# Altium PCB Industrıal Com Board wıth GSM and GPS modules.PcbDoc (part 1 of 2)
Units mm, origin at the board's own origin, x right, y up, seen from the top; angles counter-clockwise.
Board outline 162.76 x 100.02 mm, 2 copper layers (Top Layer, Bottom Layer), stack 0.325 mm thick; 201 components, 89 nets, 674 pads, 144 vias.
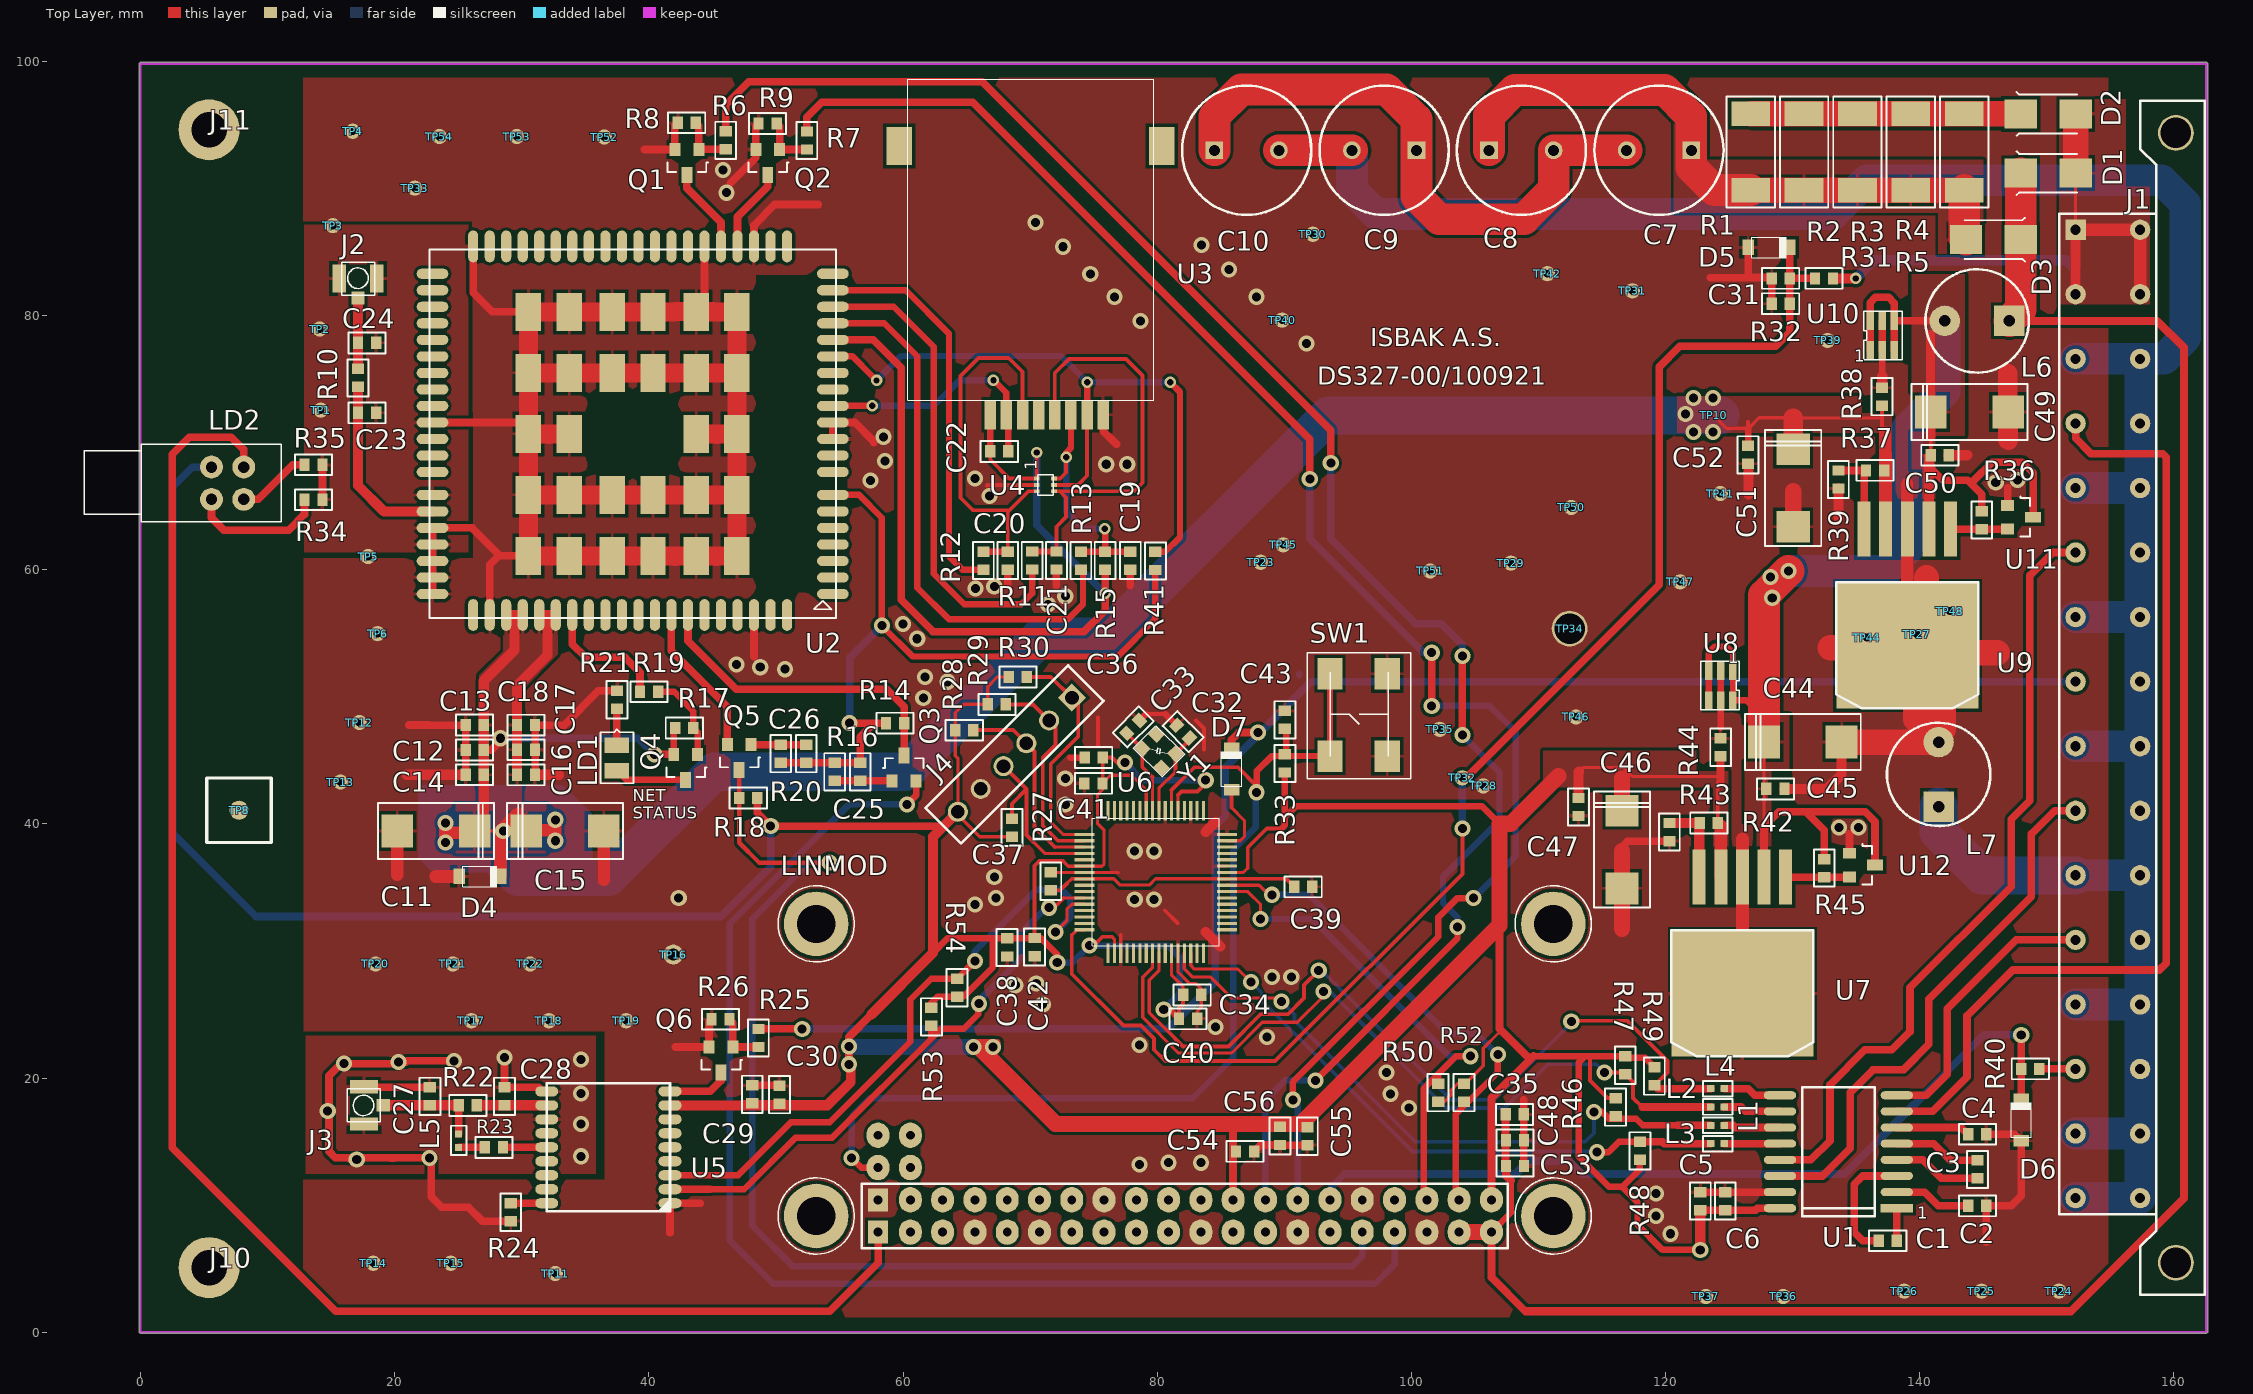
[diagram p0: Top Layer view]
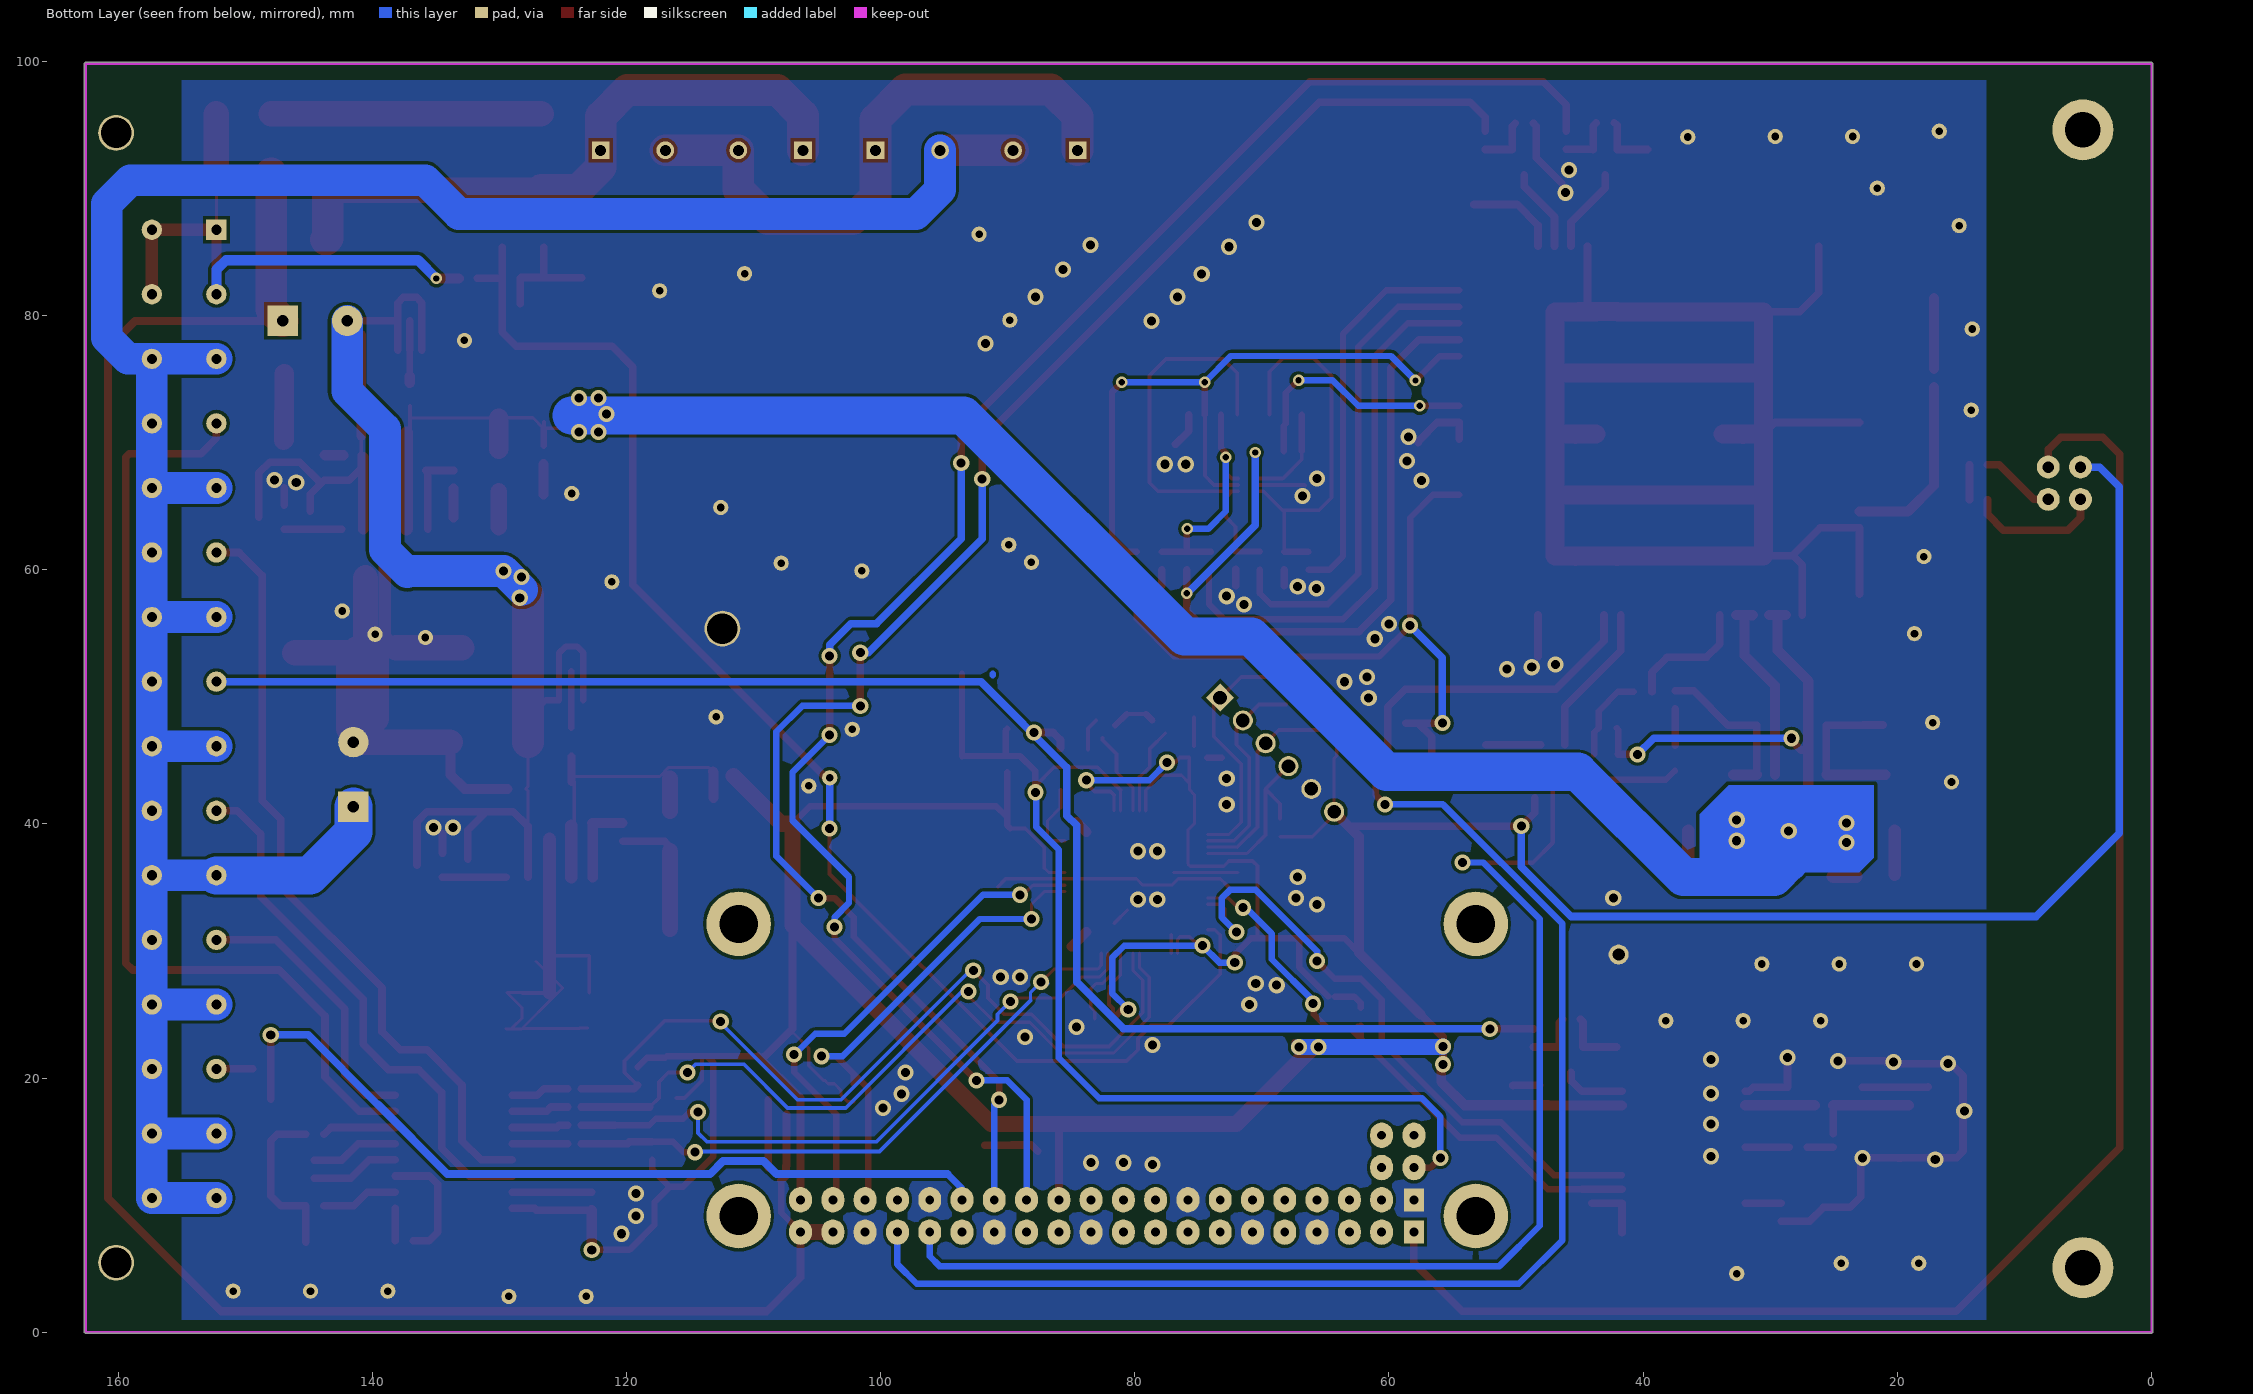
[diagram p1: Bottom Layer view, seen from below]

## Layer stack, top to bottom
Top Solder: solder mask 0.0102, Solder Resist, Dk 3.5
Top Layer: signal copper 0.0356
Dielectric 1: core 0.254, FR-4, Dk 4.2
Bottom Layer: signal copper 0.0356
Bottom Solder: solder mask 0.0102, Solder Resist, Dk 3.5

## Board outline
-0.1,0 0,-0.1 162.56,-0.1 162.66,0 162.66,99.822 162.56,99.922 0,99.922 -0.1,99.822

## Design rules (kind name [scope] priority, off if disabled: settings)
Clearance Clearance_4 [OnLayer('Mid-Layer 2') And (IsThruPin Or IsSMTPin Or IsWire) vs OnLayer('Mid-Layer 2') And (IsThruPin Or IsSMTPin Or IsWire Or IsVia)] p1: gap=0.2 ignorepadtopadclearanceinfootprint=FALSE
Clearance Clearance_3 [OnLayer('Mid-Layer 1') And (IsThruPin Or IsSMTPin Or IsWire) vs OnLayer('Mid-Layer 1') And (IsThruPin Or IsSMTPin Or IsWire Or IsVia)] p2: gap=0.2 ignorepadtopadclearanceinfootprint=FALSE
Clearance Clearance_2 [OnLayer('Bottom Layer') And (IsThruPin Or IsSMTPin Or IsWire) vs OnLayer('Bottom Layer') And (IsThruPin Or IsSMTPin Or IsWire Or IsVia)] p3: gap=0.2 ignorepadtopadclearanceinfootprint=FALSE
Clearance Clearance_1 [OnLayer('Top Layer') And (IsThruPin Or IsSMTPin Or IsWire Or IsVia) vs OnLayer('Top Layer') And (IsThruPin Or IsSMTPin Or IsWire Or IsVia)] p4: gap=0.127 ignorepadtopadclearanceinfootprint=FALSE
Clearance [All] p5: gap=0.203 ignorepadtopadclearanceinfootprint=FALSE except(0.254: Track-Poly SMDPad-Poly THPad-Poly Via-Poly Poly-Poly; 0.305: Track-Region SMDPad-Region THPad-Region Via-Region Poly-Region)
ComponentClearance [All] p1: gap=0 collisioncheckmode=3 verticalgap=0 showdistances=FALSE
PlaneConnect [All] p1: planeconnectstyle=Relief reliefexpansion=0.635 reliefentries=4 reliefconductorwidth=3 reliefairgap=4
PolygonConnect [All] p1: thpad.connectstyle=Direct thpad.reliefconductorwidth=0.254 thpad.reliefentries=4 thpad.polygonreliefangle="90 Angle" thpad.airgapwidth=0.254 smdpad.connectstyle=Relief smdpad.reliefconductorwidth=0.254 smdpad.reliefentries=4 smdpad.polygonreliefangle="90 Angle" smdpad.airgapwidth=0.254 via.connectstyle=Direct via.reliefconductorwidth=0.254 via.reliefentries=4 via.polygonreliefangle="90 Angle" via.airgapwidth=0.254
RoutingVias [All] p1: holewidth=0.711 width=1.27 viastyle="Through Hole" minholewidth=0.711 minwidth=1.27 maxholewidth=0.711 maxwidth=1.27
SolderMaskExpansion [All] p1: expansion=0
Width Net_Width_8 [InNet('V_INPUT')] p1: maxlimit=3 minlimit=0.2 preferedwidth=0.2
Width Net_Width_7 [InNet('UART3_RX') Or InNet('UART3_TX') Or InNet('USIM_CLK') Or InNet('USIM_DATA') Or InNet('USIM_GND') Or InNet('USIM_PRESENCE') Or InNet('USIM_RST') Or InNet('USIM_VDD') Or InNet('VCC_RESET') Or InNet('VCC_RESET2') Or InNet('VDDC') Or InNet('VDD_EXT')] p2: maxlimit=5 minlimit=0.2 preferedwidth=0.2
Width Net_Width_6 [InNet('N167764731') Or InNet('N1676049714') Or InNet('N1676049715') Or InNet('OSC1') Or InNet('OSC2') Or InNet('RST') Or InNet('STATUS') Or InNet('TCK') Or InNet('TDI') Or InNet('TDO') Or InNet('TMS') Or InNet('UART1_RXD') Or InNet('UART1_TXD')] p3: maxlimit=5 minlimit=0.2 preferedwidth=0.2
Width Net_Width_5 [InNet('N16976209') Or InNet('N16988393') Or InNet('N17001399') Or InNet('N17001733') Or InNet('N17012943') Or InNet('N17059960') Or InNet('N17103685') Or InNet('N17104446') Or InNet('N17118642') Or InNet('N17156443') Or InNet('N167764730')] p4: maxlimit=5 minlimit=0.2 preferedwidth=0.2
Width Net_Width_4 [InNet('N16792798') Or InNet('N16796289') Or InNet('N16825415') Or InNet('N16836609') Or InNet('N16842170') Or InNet('N16844098') Or InNet('N16844265') Or InNet('N16846634') Or InNet('N16893081') Or InNet('N16923026') Or InNet('N16926936')] p5: maxlimit=5 minlimit=0.2 preferedwidth=0.2
Width Net_Width_3 [InNet('N16761441') Or InNet('N16761497') Or InNet('N16761509') Or InNet('N16761521') Or InNet('N16761653') Or InNet('N16761697') Or InNet('N16769502') Or InNet('N16769674') Or InNet('N17181676') Or InNet('N16774897') Or InNet('N16791227')] p6: maxlimit=5 minlimit=0.2 preferedwidth=0.2
Width Net_Width_2 [InNet('LTE_ON/OFF_MC') Or InNet('LTE_RST') Or InNet('LTE_RST_MC') Or InNet('LTE_RX') Or InNet('LTE_RX_16760497') Or InNet('LTE_RX_MC') Or InNet('LTE_TX') Or InNet('LTE_TX_16760497') Or InNet('LTE_TX_MC') Or InNet('N16760577') Or InNet('N16760589')] p7: maxlimit=5 minlimit=0.2 preferedwidth=0.2
Width Net_Width_1 [InNet('+3V3') Or InNet('+3V8') Or InNet('+5V') Or InNet('+5VF') Or InNet('AN0') Or InNet('GND') Or InNet('GND_SIGNAL') Or InNet('GPS-RST') Or InNet('GPS_RST_CPU') Or InNet('GPS_RX') Or InNet('GPS_TX') Or InNet('LTE_ON/OFF') Or InNet('LTE_ON/OFF_CPU')] p8: maxlimit=5 minlimit=0.2 preferedwidth=0.2
Width [All] p9: maxlimit=5 minlimit=0.203 preferedwidth=0.203
28 further rules are at their usual default settings.

## Classes and differential pairs
component class Power: C44 C45 C46 C47 C49 C50 C51 C52 J10 J11 L6 L7 LD2 R34 R35 R36 R37 R38 R39 R42 R43 R44 R45 U7 U8 U9 U10 U11 U12
component class Microcontroller: C31 C32 C33 C34 C35 C36 C37 C38 C39 C40 C41 C42 C43 D5 D6 J4 R28 R29 R30 R31 R32 R33 R40 R50 R52 R53 R54 SW1 Y1
component class GPS: C27 C28 C29 C30 J3 L5 Q6 R22 R23 R24 R25 R26 TP38 TP43 TP49 U5
component class GPRS-LTE: C11 C12 C13 C14 C15 C16 C17 C18 C19 C20 C21 C22 C23 C24 C25 C26 D4 J2 LD1 Q1 Q2 Q3 Q4 Q5 R6 R7 R8 R9 R10 R11 R12 R13 R14 R15 R16 R17 R18 R19 R20 R21 R41 U2 U3 U4
component class Connector-PowerCUT: C1 C2 C3 C4 C5 C6 C7 C8 C9 C10 D1 D2 D3 J1 L1 L2 L3 L4 R1 R2 R3 R4 R5 R46 R47 R48 R49 U1

## Components (designator, comment, footprint, x,y, rotation, side; value= is the part's Value field where it differs from the comment)
C1 "100nF" SM/C_0603 138.196,7.193 r180 top
C2 "100nF" SM/C_0603 143.825,9.947 r0 top
C3 "100nF" SM/C_0603 144.546,12.101 r90 top
C4 "100nF" SM/C_0603 143.825,15.585 r0 top
C5 "100nF" SM/C_0603 122.733,9.601 r90 top
C6 "10UF" SM/C_0603 124.694,9.601 r90 top
C7 "10F-2V7" CPCYL1/D.400/LS.200/.034 122.025,93 r180 top
C8 "10F-2V7" CPCYL1/D.400/LS.200/.034 106.117,93 r0 top
C9 "10F-2V7" CPCYL1/D.400/LS.200/.034 100.4,93 r180 top
C10 "10F-2V7" CPCYL1/D.400/LS.200/.034 84.5,93 r0 top
C11 "100uF" SM/C_2917 25.166,39.431 r180 top
C12 "100nF" SM/C_0603 27.005,45.812 r180 top
C13 "33pF" SM/C_0603 27.005,47.773 r180 top
C14 "10pF" SM/C_0603 27.005,43.861 r180 top
C15 "100uF" SM/C_2917 31.496,39.431 r0 top
C16 "100nF" SM/C_0603 29.626,43.861 r0 top
C17 "33pF" SM/C_0603 29.626,45.832 r0 top
C18 "10pF" SM/C_0603 29.626,47.773 r0 top
C19 "33pF" SM/C_0603 77.881,60 r90 top
C20 "33pF" SM/C_0603 68.24,60 r90 top
C21 "33pF" SM/C_0603 72.07,60.01 r90 top
C22 "100nF" SM/C_0603 66.863,69.312 r0 top
C23 "C" SM/C_0603 17.12,72.349 r0 top
C24 "C" SM/C_0603 17.12,77.845 r0 top
C25 "1nF" SM/C_0603 56.642,44.806 r270 top
C26 "1nF" SM/C_0603 50.378,44.811 r90 top
C27 "C" SM/C_0603 22.769,17.851 r90 top
C28 "C" SM/C_0603 28.641,17.851 r90 top
C29 "10uF" SM/C_0603 48.133,18.009 r90 top
C30 "100nF" SM/C_0603 50.277,17.978 r90 top
C31 "100nF" SM/C_0603 129.774,82.916 r180 top
C32 "12pF" SM/C_0603 82.54,46.746 r135 top
C33 "12pF" SM/C_0603 77.607,47.127 r45 top
C34 "100nF" SM/C_0603 82.042,26.543 r0 top
C35 "100nF" SM/C_0603 107.417,17.145 r0 top
C36 "100nF" SM/C_0603 75.717,45.212 r180 top
C37 "100nF" SM/C_0603 71.628,34.773 r90 top
C38 "100nF" SM/C_0603 68.199,30.988 r270 top
C39 "1uF" SM/C_0603 90.78,35.052 r0 top
C40 "100nF" SM/C_0603 81.723,24.663 r0 top
C41 "10nF" SM/C_0603 75.692,43.18 r180 top
C42 "2.2uF" SM/C_0603 70.358,31.013 r270 top
C43 "0.1uF" SM/C_0603 90.043,47.473 r90 top
C44 "470uF" SM/C_2917 128.9,46.431 r0 top
C45 "100nF" SM/C_0603 127.935,42.753 r0 top
C46 "470uF" SM/C_2917 116.586,39.878 r270 top
C47 "100nF" SM/C_0603 113.157,42.037 r270 top
C48 "100nF" SM/C_0603 108.864,15.113 r180 top (schematic designator C35)
C49 "470uF" SM/C_2917 142.016,72.41 r0 top
C50 "100nF" SM/C_0603 140.868,69.007 r0 top
C51 "470uF" SM/C_2917 130.048,68.326 r270 top
C52 "100nF" SM/C_0603 126.492,69.748 r270 top
C53 "100nF" SM/C_0603 108.864,13.081 r180 top (schematic designator C35)
C54 "100nF" SM/C_0603 87.63,14.224 r180 top (schematic designator C35)
C55 "100nF" SM/C_0603 91.821,16.129 r270 top (schematic designator C35)
C56 "100nF" SM/C_0603 89.662,14.732 r90 top (schematic designator C35)
D1 "B340A" SM/DO214AC_21 152.268,91.196 r0 top
D2 "B340A" SM/DO214AC_21 152.268,95.86 r0 top
D3 "B340A" SM/DO214AC_21 143.637,85.969 r180 top
D4 "5.1V 0.5W" SMD_SOD-123 26.7,35.865 r180 top
D5 "3.3V" SMD_SOD-123 128.138,85.354 r180 top
D6 "3.3V" SMD_SOD-123 147.991,16.693 r270 top
D7 "5.1V 0.5W" SMD_SOD-123 85.852,44.323 r270 top (schematic designator D4)
J1 "CON32A" "32 PIN KONNEKTOR_1-2" 152.265,86.749 r270 top locked
J2 "UF.L-R-SMT" UF.L-R-SMT_ANTENNA_CONNECTOR 17.12,81.381 r0 top
J3 "UF.L-R-SMT" UF.L-R-SMT_ANTENNA_CONNECTOR 19.101,17.851 r90 top
J4 "1X6 HEADER DISI" PRG.SOKET_ARM 73.297,49.929 r225 top
J10 "CON1" MTHOLE_4.8/2.8 5.397,5.08 r0 top locked
J11 "CON1" MTHOLE_4.8/2.8 5.397,94.615 r0 top locked
L1 "1.4 GHZ" SM/R_0402 123.556,16.276 r0 top
L2 "1.4 GHZ" SM/R_0402 123.556,17.719 r0 top
L3 "1.4GHZ" SM/R_0402 123.556,14.834 r0 top
L4 "1.4 GHZ" SM/R_0402 123.556,19.162 r0 top
L5 "47nH" SM/R_0402 25.039,14.544 r90 top
L6 "74275023 Ferrit Bead" "100MF/35V 5MM" 147.056,79.573 r180 top
L7 "74275023 Ferrit Bead" "100MF/35V 5MM" 141.488,41.351 r90 top
LD1 "LTE" SM/D_0805_21 37.49,44.186 r270 top
LD2 "1x2 LED DIYOT" "LED 1X2'LI GRUP" 5.588,68.072 r90 top locked
LINMOD "Comment" PCBCOMPONENT_1 68.204,10.389 r180 top locked
Q1 "BC817-40" SM/SOT23_BEC 42.052,93.061 r180 top
Q2 "BC817-40" SM/SOT23_BEC 48.417,93.061 r180 top
Q3 "BC817-40" SM/SOT23_BEC 61.031,43.384 r0 top
Q4 "BC807-40" SM/SOT23_123 43.84,45.466 r180 top
Q5 "BC817-40" SM/SOT23_BEC 46.172,46.234 r180 top
Q6 "BC817-40" SM/SOT23_BEC 44.734,22.438 r180 top
R1 "10R" SM/R_2512 126.7,95.86 r270 top
R2 "10R" SM/R_2512 130.9,95.86 r270 top
R3 "10R" SM/R_2512 135.1,95.86 r270 top
R4 "10R" SM/R_2512 139.3,95.86 r270 top
R5 "10R" SM/R_2512 143.5,95.86 r270 top
R6 "4K7" SM/R_0603 46.053,94.496 r270 top
R7 "4K7" SM/R_0603 52.441,94.483 r270 top
R8 "47K" SM/R_0603 42.266,95.169 r0 top
R9 "47K" SM/R_0603 48.631,95.113 r0 top
R10 "0R" SM/R_0603 17.12,74.381 r90 top
R11 "22R" SM/R_0603 70.17,61.432 r270 top
R12 "22R" SM/R_0603 66.33,61.422 r270 top
R13 "22R" SM/R_0603 74,61.422 r270 top
R14 "10K" SM/R_0603 60.086,47.915 r180 top
R15 "15K" SM/R_0603 75.9,60 r90 top
R16 "4K7" SM/R_0603 54.63,44.806 r270 top
R17 "47K" SM/R_0603 42.083,47.539 r0 top
R18 "10K" SM/R_0603 47.111,42.043 r0 top
R19 "4K7" SM/R_0603 40.731,50.384 r180 top
R20 "4K7" SM/R_0603 52.379,44.811 r90 top
R21 "2K2" SM/R_0603 37.49,49.053 r90 top
R22 "0R" SM/R_0603 25.044,17.851 r0 top
R23 "10R" SM/R_0603 27.097,14.549 r0 top
R24 "0R" SM/R_0603 29.129,8.727 r90 top
R25 "4K7" SM/R_0603 48.626,23.861 r270 top
R26 "47K" SM/R_0603 44.928,24.628 r0 top
R27 "100k" SM/R_0603 68.58,38.989 r90 top
R28 "100k" SM/R_0603 64.11,47.371 r0 top
R29 "100k" SM/R_0603 66.675,49.403 r0 top
R30 "100k" SM/R_0603 68.326,51.562 r0 top
R31 "1K" SM/R_0603 133.177,82.916 r180 top
R32 "1K" SM/R_0603 129.774,80.924 r180 top
R33 "10K" SM/R_0603 90.043,44.044 r90 top
R34 "220R" SM/R_0603 12.903,65.512 r0 top
R35 "220R" SM/R_0603 12.903,68.265 r0 top
R36 "51K" SM/R_0603 144.892,64.607 r270 top
R37 "100K 1%" SM/R_0603 137.201,67.808 r180 top
R38 "470R" SM/R_0603 137.033,72.898 r90 top
R39 "47K 1%" SM/R_0603 133.604,67.808 r270 top
R40 "1K" SM/R_0603 149.413,20.716 r180 top
R41 "51K" SM/R_0603 79.853,59.98 r90 top
R42 "78K7 1%" SM/R_0603 124.115,40.061 r180 top
R43 "47K 1%" SM/R_0603 120.305,40.061 r270 top
R44 "470R" SM/R_0603 124.333,45.314 r90 top
R45 "51K" SM/R_0603 132.497,37.226 r270 top
R46 "100k" SM/R_0603 116.078,18.415 r270 top
R47 "100k" SM/R_0603 116.84,21.717 r270 top
R48 "100k" SM/R_0603 117.983,13.564 r90 top
R49 "100k" SM/R_0603 119.126,20.853 r270 top
R50 "100k" SM/R_0603 102.108,19.558 r270 top
R52 "100k" SM/R_0603 104.14,18.136 r90 top
R53 "100k" SM/R_0603 62.23,24.105 r90 top
R54 "100k" SM/R_0603 64.262,27.813 r270 top
SW1 "SW PUSHBUTTON-SPST-2" PUSHBUTTON-SMD 93.599,45.316 r90 top
TP1 "T POINT R" VIA#1 14.183,72.553 r90 top
TP2 "T POINT R" VIA#1 14.102,78.933 r90 top
TP3 "T POINT R" VIA#1 15.138,87.071 r90 top
TP4 "T POINT R" VIA#1 16.703,94.498 r90 top
TP5 "T POINT R" VIA#1 17.912,61.031 r90 top
TP6 "T POINT R" VIA#1 18.654,54.966 r90 top
TP8 "T POINT R" FIDUCIAL 7.757,41.072 r0 top
TP10 "3V8" TP1 123.779,72.136 r0 top
TP11 "T POINT R" VIA#1 32.634,4.613 r90 top
TP12 "T POINT R" VIA#1 17.221,47.965 r90 top
TP13 "T POINT R" VIA#1 15.738,43.292 r90 top
TP14 "T POINT R" VIA#1 18.318,5.425 r180 top
TP15 "T POINT R" VIA#1 24.414,5.425 r180 top
TP16 "T POINT R" VIA#2 41.93,29.718 r90 top
TP17 "T POINT R" VIA#1 26.035,24.511 r180 top
TP18 "T POINT R" VIA#1 32.131,24.511 r180 top
TP19 "T POINT R" VIA#1 38.217,24.511 r180 top
TP20 "T POINT R" VIA#1 18.491,28.976 r180 top
TP21 "T POINT R" VIA#1 24.577,28.976 r180 top
TP22 "T POINT R" VIA#1 30.663,28.976 r180 top
TP23 "T POINT R" VIA#1 88.138,60.579 r0 top
TP24 "T POINT R" VIA#1 150.947,3.231 r0 top
TP25 "T POINT R" VIA#1 144.861,3.231 r0 top
TP26 "T POINT R" VIA#1 138.775,3.231 r0 top
TP27 "T POINT R" VIA#1 139.781,54.915 r90 top
TP28 "T POINT R" VIA#1 105.654,42.987 r90 top
TP29 "T POINT R" VIA#1 107.828,60.513 r90 top
TP30 "T POINT R" VIA#1 92.253,86.39 r90 top
TP31 "T POINT R" VIA#1 117.389,81.94 r90 top
TP32 "T POINT R" VIA#1 104.003,43.622 r90 top (schematic designator TP28)
TP33 "T POINT R" VIA#1 21.58,90.018 r0 top
TP34 "T POINT R" VIA#3 112.451,55.362 r0 top
TP35 "T POINT R" VIA#1 102.23,47.437 r0 top
TP36 "T POINT R" VIA#1 129.256,2.814 r0 top
TP37 "T POINT R" VIA#1 123.17,2.814 r0 top
TP39 "T POINT R" VIA#1 132.751,78.039 r0 top
TP40 "T POINT R" VIA#1 89.835,79.634 r0 top
TP41 "T POINT R" VIA#1 124.308,65.989 r0 top
TP42 "T POINT R" VIA#1 110.703,83.292 r0 top
TP44 "T POINT R" VIA#1 135.819,54.661 r0 top
TP45 "T POINT R" VIA#1 89.916,61.956 r0 top
TP46 "T POINT R" VIA#1 112.949,48.412 r0 top
TP47 "T POINT R" VIA#1 121.148,59.04 r0 top
TP48 "T POINT R" VIA#1 142.362,56.744 r0 top
TP50 "T POINT R" VIA#1 112.583,64.892 r0 top
TP51 "T POINT R" VIA#1 101.478,59.903 r0 top
TP52 "T POINT R" VIA#1 36.495,94.041 r0 top
TP53 "T POINT R" VIA#1 29.606,94.082 r0 top
TP54 "T POINT R" VIA#1 23.52,94.082 r0 top
U1 "MAX3232" SOG.050/16/WG.420/L.400 138.196,9.754 r90 top
U2 "EC21-QUECTEL" EC21-QUECTEL 54.478,58.085 r180 top
U3 "SIM HOLDER" SIM_HOLDER 79.715,98.593 r180 top
U4 "ESDA6V8AV6" SMD_SOT-563 70.534,67.171 r270 top
U5 "L70-RL_GPS" L70-RL_GPS_QUECTEL 41.666,10.15 r0 top
U6 "TM4C123GH6PMI" TM4C123GH6PMI 85.487,31.671 r90 top
U7 "MIC29302WU" MIC29302 129.449,35.804 r180 top
U8 "ESDA6V1SC6_2" SOT23-6L 125.303,52.019 r180 top
U9 "MIC29302WU" MIC29302 142.423,63.185 r180 top
U10 "ESDA6V1SC6_2" SOT23-6L 136.103,77.277 r0 top
U11 "MAX809JEURT" SM/SOT23_123 146.914,65.065 r270 top
U12 "MAX809JEURT" SM/SOT23_123 134.475,37.686 r270 top
Y1 "16 Mhz SMD 3.2 x 2.5 mm kristal" KRISTAL_403SERI 80.137,45.72 r135 top

## Footprints (in the part's own frame and the unit in brackets; to place one, negate y for a bottom-side part, rotate by r counter-clockwise, add the part's x,y. Pads: shape width x height; smd on the part's side, far side on the other; paste and mask are expansions set on the pad)
"32 PIN KONNEKTOR_1-2" [mil]
  rect 63x63 hole 31.5: 1(0,0)
  round 63 hole 31.5: 2(0,200) 3(200,0) 4(200,200) 5(400,0) 6(400,200) 7(600,0) 8(600,200) 9(800,0) 10(800,200) 11(1000,0) 12(1000,200) 13(1200,0) 14(1200,200) 15(1400,0) 16(1400,200) 17(1600,0) 18(1600,200) 19(1800,0) 20(1800,200) 21(2000,0) 22(2000,200) 23(2200,0) 24(2200,200) 25(2400,0) 26(2400,200) 27(2600,0) 28(2600,200) 29(2800,0) 30(2800,200) 31(3000,0) 32(3000,200)
  round 111 hole 95 mask+5: 33(-300,310.63) 34(3200,310.63)
  silkscreen extent -400,-50 3300,400
"100MF/35V 5MM" [mm]
  rect 2.399x2.399 / inner rect 1.8x1.8 / far side rect 2.399x2.399 hole 0.9: 1(0,0)
  round 2.399 / inner round 1.8 / far side round 2.399 hole 0.9: 2(5.08,0)
  silkscreen extent -1.52,-4.06 6.6,4.06
CPCYL1/D.400/LS.200/.034 [mil]
  rect 55x55 hole 34: 1(0,0)
  round 55 hole 34: 2(200,0)
  silkscreen extent -100,-200 300,200
EC21-QUECTEL [mil]
  oval 98.4x31.47 smd: 1(0,0) 2(0,-51.17) 3(0,-102.35) 4(0,-153.53) 5(0,-204.72) 6(0,-255.9) 7(0,-307.08) 8(0,-480.3) 9(0,-531.48) 10(0,-582.67) 11(0,-633.85) 12(0,-685.03) 13(0,-736.22) 14(0,-787.4) 15(0,-838.57) 16(0,-889.75) 17(0,-940.93) 18(0,-992.12) 37(1240.15,-992.12) 38(1240.15,-940.93) 39(1240.15,-889.75) 40(1240.15,-838.57) 41(1240.15,-787.4) 42(1240.15,-736.22) 43(1240.15,-685.03) 44(1240.15,-633.85) 45(1240.15,-582.67) 46(1240.15,-531.48) 47(1240.15,-480.3) 48(1240.15,-307.08) 49(1240.15,-255.9) 50(1240.15,-204.72) 51(1240.15,-153.53) 52(1240.15,-102.35) 53(1240.15,-51.17) 54(1240.15,0) 141(0,-377.95) 142(0,-429.13) 143(1240.15,-429.13) 144(1240.15,-377.95)
  oval 31.47x98.4 smd: 19(244.08,-1076.77) 20(295.27,-1076.77) 21(346.45,-1076.77) 22(397.63,-1076.77) 23(448.82,-1076.77) 24(500,-1076.77) 25(551.17,-1076.77) 26(602.35,-1076.77) 27(653.53,-1076.77) 28(704.72,-1076.77) 29(755.9,-1076.77) 30(807.08,-1076.77) 31(858.27,-1076.77) 32(909.43,-1076.77) 33(960.62,-1076.77) 34(1011.8,-1076.77) 35(1063,-1076.77) 36(1114.17,-1076.77) 55(1114.17,64.95) 56(1063,64.95) 57(1011.8,64.95) 58(960.62,64.95) 59(909.43,64.95) 60(858.27,64.95) 61(807.08,64.95) 62(755.9,64.95) 63(704.72,64.95) 64(653.53,64.95) 65(602.35,64.95) 66(551.17,64.95) 67(500,64.95) 68(448.82,64.95) 69(397.63,64.95) 70(346.45,64.95) 71(295.27,64.95) 72(244.08,64.95) 113(192.9,64.95) 114(141.72,64.95) 115(192.9,-1076.77) 116(141.72,-1076.77)
  rect 78.73x118.1 smd: 85(942.9,-118.1) 86(942.9,-307.08) 87(942.9,-496.05) 88(942.9,-685.03) 89(942.9,-874) 90(816.92,-118.1) 91(816.92,-307.08) 92(816.92,-496.05) 93(816.92,-685.03) 94(816.92,-874) 95(683.07,-118.1) 96(683.07,-307.08) 97(683.07,-685.03) 98(683.07,-874) 99(557.08,-118.1) 100(557.08,-307.08) 101(557.08,-685.03) 102(557.08,-874) 103(423.22,-118.1) 104(423.22,-307.08) 105(423.22,-496.05) 106(423.22,-685.03) 107(423.22,-874) 108(297.23,-118.1) 109(297.23,-307.08) 110(297.23,-496.05) 111(297.23,-685.03) 112(297.23,-874)
  silkscreen extent -10,-1067 1250,75
FIDUCIAL [mm]
  round 1.499 smd: 1(0,0)
  silkscreen extent -2.54,-2.54 2.54,2.54
KRISTAL_403SERI [mil]
  rect 39.37x35.4 smd: 1(-42.32,-30.5) 2(42.32,-30.5) 3(42.32,30.5) 4(-42.32,30.5)
  silkscreen extent -63,-49 63,49
L70-RL_GPS_QUECTEL [mm]
  oval 1.799x0.799 smd: 1(0,0) 2(0,1.1) 3(0,2.2) 4(0,3.3) 5(0,4.4) 6(0,5.5) 7(0,6.6) 8(0,7.7) 9(0,8.8) 10(-9.7,8.8) 11(-9.7,7.7) 12(-9.7,6.6) 13(-9.7,5.5) 14(-9.7,4.4) 15(-9.7,3.3) 16(-9.7,2.2) 17(-9.7,1.1) 18(-9.7,0)
  silkscreen extent -9.7,-0.65 0,9.45
"LED 1X2'LI GRUP" [mm]
  round 1.8 hole 0.9: 1(-2.54,0) 2(0,0) 3(0,-2.54) 4(-2.54,-2.54)
  silkscreen extent -4.29,-5.49 1.81,10.01
MIC29302 [mm]
  rect 1.019x4.32 smd: 1(0,0) 2(1.7,0) 3(3.4,0) 4(5.1,0) 5(6.8,0)
  rect 11.179x9.909 smd: 6(3.4,9.145)
  silkscreen extent -2.19,4.19 8.99,14.09
MTHOLE_4.8/2.8 [mil]
  round 188.97 hole 110: 1(0,0)
PCBCOMPONENT_1 [mm]
  oval 1.8x2 hole 0.699: 1(-38.095,-0.025) 2(-38.095,2.515) 3(-35.555,-0.025) 4(-35.555,2.515) 5(-33.015,-0.025) 6(-33.015,2.515) 7(-30.475,-0.025) 8(-30.475,2.515) 9(-27.935,-0.025) 10(-27.935,2.515) 11(-25.395,-0.025) 12(-25.395,2.515) 13(-22.855,-0.025) 14(-22.855,2.515) 15(-20.315,-0.025) 16(-20.315,2.515) 17(-17.775,-0.025) 18(-17.775,2.515) 19(-15.235,-0.025) 20(-15.235,2.515) 21(-12.695,-0.025) 22(-12.695,2.515) 23(-10.155,-0.025) 24(-10.155,2.515) 25(-7.615,-0.025) 26(-7.615,2.515) 27(-5.075,-0.025) 28(-5.075,2.515) 29(-2.535,-0.025) 30(-2.535,2.515) 31(0.005,-0.025) 32(0.005,2.515) 33(2.545,-0.025) 34(2.545,2.515) 35(5.085,-0.025) 36(5.085,2.515) 37(7.625,-0.025) 38(7.625,2.515) 41(7.625,-5.105) 42(7.625,-2.565) 43(10.165,-5.105) 44(10.165,-2.565)
  rect 1.599x1.8 hole 0.699: 39(10.165,-0.025) 40(10.165,2.515)
  round 5.08 hole 3 unplated: ""(-42.964,-21.742) ""(-42.964,1.245) ""(15.034,1.245) ""(15.034,-21.742)
  silkscreen extent -45.96,-24.74 18.03,4.24
PRG.SOKET_ARM [mil]
  rect 62x62 hole 42: 1(0,0)
  round 62 hole 42: 2(100,0) 3(200,0) 4(300,0) 5(400,0) 6(500,0)
  silkscreen extent -62,-79 563,76
PUSHBUTTON-SMD [mm]
  rect 2.5x2 smd: 1(0,0) 2(6.5,0) 3(0,-4.5) 4(6.5,-4.5)
  silkscreen extent -1.78,-6.35 8.13,1.78
SIM_HOLDER [mm]
  rect 0.899x2.3 smd: 1(12.85,26.4) 2(11.58,26.4) 3(10.31,26.4) 4(9.04,26.4) 5(7.77,26.4) 6(6.5,26.4) 7(5.23,26.4) 8(3.96,26.4)
  rect 2x3 smd: A(-0.65,5.25) B(20,5.25)
  silkscreen extent 0,0 19.35,25.25
SM/C_0603 [mil]
  rect 32x38 smd: 1(0,0) 2(56,0)
  silkscreen extent -30,-33 86,32
SM/C_2917 [mm]
  rect 2.5x2.6 smd: 1(-1.145,0) 2(4.955,0)
  silkscreen extent -2.65,-2.2 6.46,2.2
SM/D_0805_21 [mil]
  rect 48x76 smd: 1(0,0) 2(-79,0)
  silkscreen extent -128,-52 39,52
SM/DO214AC_21 [mil]
  rect 100x90 smd: 1(0,0) 2(-170,0)
  silkscreen extent -182,-68 5,68
SM/R_0402 [mil]
  rect 22x22 smd: 1(0,0) 2(42,0)
  silkscreen extent -24,-24 67,24
SM/R_0603 [mil]
  rect 32x38 smd: 1(0,0) 2(56,0)
  silkscreen extent -30,-33 86,32
SM/R_2512 [mil]
  rect 76x120 smd: 1(0,0) 2(236,0)
  silkscreen extent -55,-75 290,75
SM/SOT23_123 [mil]
  rect 34x40 smd: 1(0,0) 2(74,0)
  rect 34x50 smd: 3(37,79)
  silkscreen extent -28,40 97,70
SM/SOT23_BEC [mil]
  rect 34x40 smd: B(-74,0) E(0,0)
  rect 34x50 smd: C(-37,79)
  silkscreen extent -102,40 23,70
SMD_SOD-123 [mil]
  rect 35.8x48 smd: 1(-64.37,0) 2(64.37,0)
  silkscreen extent -53,-32 53,32
SMD_SOT-563 [mm]
  rect 0.299x0.449 smd: 1(0,0) 2(0.5,0) 3(0.999,0) 4(0.999,1.35) 5(0.5,1.35) 6(0,1.35)
  silkscreen extent -0.3,0.05 1.3,1.3
SOG.050/16/WG.420/L.400 [mil]
  rect 25x100 smd: 1(0,0)
  oval 25x100 smd: 2(50,0) 3(100,0) 4(150,0) 5(200,0) 6(250,0) 7(300,0) 8(350,0) 9(350,362) 10(300,362) 11(250,362) 12(200,362) 13(150,362) 14(100,362) 15(50,362) 16(0,362)
  silkscreen extent -25,68 375,294
SOT23-6L [mm]
  rect 0.599x1.4 smd: 1(0,0) 2(0.95,0) 3(1.9,0) 4(1.9,2.3) 5(0.95,2.3) 6(0,2.3)
  silkscreen extent -0.51,-0.76 2.54,3.05
TM4C123GH6PMI [mil]
  rect 61x9.83 smd: 1(-72.83,368.1) 2(-72.83,348.42) 3(-72.83,328.73) 4(-72.83,309.05) 5(-72.83,289.37) 6(-72.83,269.68) 7(-72.83,250) 8(-72.83,230.3) 9(-72.83,210.62) 10(-72.83,190.93) 11(-72.83,171.25) 12(-72.83,151.57) 13(-72.83,131.88) 14(-72.83,112.2) 15(-72.83,92.52) 16(-72.83,72.83) 33(368.1,72.83) 34(368.1,92.52) 35(368.1,112.2) 36(368.1,131.88) 37(368.1,151.57) 38(368.1,171.25) 39(368.1,190.93) 40(368.1,210.62) 41(368.1,230.3) 42(368.1,250) 43(368.1,269.68) 44(368.1,289.37) 45(368.1,309.05) 46(368.1,328.73) 47(368.1,348.42) 48(368.1,368.1)
  rect 9.83x61 smd: 17(0,0) 18(19.68,0) 19(39.37,0) 20(59.05,0) 21(78.73,0) 22(98.42,0) 23(118.1,0) 24(137.78,0) 25(157.47,0) 26(177.15,0) 27(196.85,0) 28(216.53,0) 29(236.22,0) 30(255.9,0) 31(275.58,0) 32(295.27,0) 49(295.27,440.93) 50(275.58,440.93) 51(255.9,440.93) 52(236.22,440.93) 53(216.53,440.93) 54(196.85,440.93) 55(177.15,440.93) 56(157.47,440.93) 57(137.78,440.93) 58(118.1,440.93) 59(98.42,440.93) 60(78.73,440.93) 61(59.05,440.93) 62(39.37,440.93) 63(19.68,440.93) 64(0,440.93)
  silkscreen extent -49,24 344,417
TP1 [mm]
UF.L-R-SMT_ANTENNA_CONNECTOR [mm]
  rect 1x1.05 smd: 1(0,0)
  rect 1.05x2.2 smd: 2(-1.475,1.525) 3(1.475,1.525)
  silkscreen extent -1.3,0.22 1.3,2.82
VIA#1 [mm]
  round 1.2 hole 0.599: 1(0,0)
VIA#2 [mm]
  round 1.575 hole 0.965 mask+0.127: 1(0,0)
VIA#3 [mm]
  round 2.819 hole 2.413 mask+0.127: 1(0,0)

## Part data
C1 C2 C3 C4 C5 C7 C8 C9 C10 C11 C15 C44 C46 C49 C51: library part C
C6: library part "CAP POL"
C12 C13 C14 C16 C17 C18 C19 C20 C21 C22 C25 C26 C45 C47 C50 C52: library part "CAPACITOR NON-POL"
C23 C24 C27 C28 C29 C30 C31 C34 C35 C36 C37 C38 C39 C40 C41 C42 C48 C53 C54 C55 C56: library part "CAP NP"
C32 C33 C43: library part CAP
D1 D2 D3: library part DIODE
D4 D5 D6 D7: library part "DIODE ZENER_0"
J2 J3: library part "PLUG AC FEMALE_0"
J4: library part "HEADER 6"
L1 L2 L3 L4: library part "BEAD FERRITE/SM"
L5 L6 L7: library part INDUCTOR
LD1: library part LED
LD2: library part LED_0
Q1 Q2 Q3 Q5 Q6: library part BC237_0
Q4: library part BC856AL
R1 R2 R3 R4 R5 R6 R7 R8 R9 R10 R11 R12 R13 R14 R15 R16 R17 R18 R19 R20 R21 R22 R23 R24 R25 R26 R34 R35 R36 R37 R38 R39 R41 R42 R43 R44 R45: library part R
R27 R28 R29 R30 R31 R32 R33 R40 R46 R47 R48 R49 R50 R52 R53 R54: library part RESISTOR
SW1: library part "SW PUSHBUTTON-SPST-2_0"
TP10: library part "TEST POINT"
U2: library part EC21-QUECTEL_1
U3: library part 100201/SO_3
U4: library part ESDA6V1SC6_0
U7 U9: library part MIC29302WU_0
U11 U12: library part MAX809JTRG
Y1: library part CRYSTAL_0

## Via types
v1: diameter 1.27, hole 0.711, Top Layer to Bottom Layer, 134 vias
v2: diameter 0.9, hole 0.5, Top Layer to Bottom Layer, 10 vias

## Nets (pads, with @x,y where several pads share a name; then routed paths per layer and width w, separated by ;. In a path a pad name is that pad's centre, name@x,y a point inside that pad or via, vN(x,y) a via of type N, cw(c..) or ccw(c..) an arc to the next point about the centre after c; other vN are vias at no path point)
+3V3: C5.1 C6.1 C29.1 C30.1 C34.1 C36.1 C38.1 C40.1 C41.1 C42.1 C46.1 C47.1 C54.2 C55.1 C56.2 J4.6 LD2.2 LINMOD.1 LINMOD.17 R18.2 R27.1 R28.1 R29.1 R30.1 R33.1 R42.1 R44.1 R46.1 R47.1 R48.1 R49.1 R50.2 R52.2 R53.2 R54.2 U1.16 U5.8 U6.2 U6.11 U6.26 U6.37 U6.42 U6.54 U7.4 | length 465
  Top Layer w0.25: 113.182,43.241 113.182,44.094 113.515,44.427 116.698,44.427 117.396,43.729 124.333,43.729 ; 124.115,43.307 R42.1@124.115,40.061 R42.1@124.349,39.827
  Top Layer w0.254: R30.1@68.326,51.562 67.437,51.562 66.675,50.8 R29.1@66.675,49.403 64.77,49.403 64.11,48.743 R28.1@64.11,47.371 64.11,45.364 64.317,45.157 J4.6@64.317,40.949 64.317,40.712 66.04,38.989 R27.1@68.58,38.989 ; 72.581,37.084 72.993,36.671 U6.54@74.287,36.671 75.66,36.671 75.819,36.83 75.819,39.497 75.311,40.005 75.311,42.291 75.692,42.672 C41.1@75.692,43.18 C41.1@75.717,43.205 ; C36.1@75.717,45.212 C41.1@75.717,43.205 ; 76.454,31.115 76.637,30.932 U6.2@76.637,29.821 ; U6.42@79.137,41.021 79.137,42.656 77.978,43.815 76.327,43.815 C41.1@75.717,43.205 ; U6.11@81.137,29.821 81.137,28.083 82.042,27.178 C34.1@82.042,26.67 ; U6.37@81.637,41.021 81.637,42.267 ; U6.26@85.487,36.171 86.765,36.171 87.122,36.528 ; R50.2@102.108,18.136 102.591,18.136 103.124,18.669 103.124,19.05 103.632,19.558 R52.2@104.14,19.558 104.394,19.812 104.521,19.812 105.664,20.955 105.664,22.352 106.934,23.622 107.188,23.622
  Top Layer w0.305: C42.1@70.358,31.013 70.358,36.703 70.739,37.084 72.581,37.084 ; v1(74.676,30.419) 74.996,30.419 75.692,31.115 76.454,31.115 ; C36.1@75.717,45.212 76.454,45.212 76.835,44.831 v1(77.47,44.831) ; 81.637,42.267 81.915,42.545 83.185,42.545 83.82,43.18 v1(83.82,43.434) ; C40.1@81.723,24.663 81.723,25.462 82.042,25.781 C34.1@82.042,26.543 C34.1@82.042,26.67 ; 87.122,36.528 87.122,38.124 88.622,39.624 89.789,39.624 89.814,39.649 ; 98.044,41.275 98.171,41.402 ; 114.046,21.717 114.046,19.812 115.443,18.415 R46.1@116.078,18.415
  Top Layer w0.508: R53.2@62.23,25.527 62.23,25.908 62.713,26.391 R54.2@64.262,26.391 ; 62.357,29.845 63.5,30.988 67.31,30.988 ; 64.77,26.416 67.056,28.702 67.056,30.734 67.31,30.988 ; v1(67.081,22.454) v1@67.437,22.809 ; v1(72.136,29.083) 72.136,29.718 70.841,31.013 C42.1@70.358,31.013 68.224,31.013 C38.1@68.199,30.988 67.31,30.988 ; v1(80.518,25.4) v1@80.986,25.4 ; v1@81.022,25.4 v1@80.986,25.4 ; C40.1@81.723,24.663 v1@80.986,25.4 ; 89.814,39.649 90.043,39.878 90.043,40.513 ; R33.1@90.043,44.044 90.043,40.513 ; 106.934,40.005 105.537,41.402 98.171,41.402 90.932,41.402 90.043,40.513 ; 109.601,21.717 113.665,21.717 ; R48.1@117.983,13.564 117.983,12.827 116.586,11.43 ; R49.1@119.126,20.853 118.389,21.59 116.967,21.59 R47.1@116.84,21.717 114.046,21.717 113.665,21.717 ; v1(122.733,6.472) 119.766,6.472 117.792,8.445 117.792,10.223 116.586,11.43 ; 113.665,21.717 113.157,21.209 113.157,13.843 115.57,11.43 116.586,11.43
  Top Layer w0.6: R18.2@48.534,42.043 48.534,40.874 v1(49.591,39.817) 63.185,39.817 ; C5.1@122.733,9.601 C6.1@124.694,9.601 127.081,9.601 127.234,9.754 U1.16@129.002,9.754
  Top Layer w0.635: v1@55.88,20.955 v1(55.753,21.082) v1(55.753,22.479) 55.753,23.241 57.531,25.019 ; LINMOD.17@85.979,10.414 85.979,16.256 86.106,16.383 ; LINMOD.1@106.299,10.414 106.299,18.415 109.601,21.717 ; 106.934,32.004 106.934,23.876 107.188,23.622 109.093,21.717 ; 124.333,43.307 124.333,43.729 R44.1@124.333,45.314
  Top Layer w0.762: 55.88,19.685 v1@55.88,20.955
  Top Layer w0.8: U5.8@41.666,17.849 47.496,17.849 47.498,17.851 54.046,17.851 55.88,19.685 ; 57.531,25.019 62.357,29.845 62.357,38.989 63.185,39.817 J4.6@64.317,40.949 ; C47.1@113.157,42.037 113.157,44.069 113.182,44.094 ; v1(122.733,6.472) C5.1@122.733,9.601
  Top Layer w1: U7.4@124.349,35.804 R42.1@124.349,39.827
  Top Layer w1.27: v1(67.081,22.454) 65.938,22.454 72.009,16.383 86.106,16.383 91.313,16.383 106.934,32.004 106.934,40.005 107.823,40.005 111.569,43.752 ; C46.1@116.586,41.023 116.586,43.561
  Bottom Layer w0.508: v1(72.136,29.083) 73.34,29.083 v1(74.676,30.419) 80.833,30.419 81.788,29.464 81.788,26.67 v1(80.518,25.4) ; v1(77.47,44.831) 78.867,43.434 v1(83.82,43.434)
  Bottom Layer w0.6: LD2.2@5.588,68.072 4.074,68.072 2.53,66.528 2.53,39.268 9.093,32.705 45.659,32.705 49.591,36.637 v1(49.591,39.817)
  Bottom Layer w1.27: v1(55.753,22.479) 55.778,22.454 v1(65.557,22.454) v1(67.081,22.454)
+5V: C35.1 C48.2 C53.2 D1.2 D3.2 L6.1 LINMOD.2 LINMOD.4 | length 169
  Top Layer w0.508: LINMOD.2@106.299,7.874 107.823,9.398 107.823,11.938
  Top Layer w0.635: LINMOD.2@106.299,7.874 106.299,4.318 108.966,1.651 151.892,1.651 160.782,10.541 160.782,77.47 158.679,79.573 L6.1@147.056,79.573 ; C35.1@107.417,17.145 107.417,13.106 C53.2@107.442,13.081 107.442,12.319 107.823,11.938
  Top Layer w1.27: LINMOD.4@103.759,7.874 LINMOD.2@106.299,7.874
  Top Layer w2.5: L6.1@147.056,79.573 147.955,80.472 D3.2@147.955,85.969 147.95,85.974 D1.2@147.95,91.196
+5VF: C44.1 C45.1 C49.1 C50.1 L6.2 R36.1 R45.1 U7.2 U8.1 U8.3 U8.4 U8.6 U9.2 U10.1 U10.3 U10.4 U10.6 U11.3 U12.3 | length 137.7
  Top Layer w0.25: U7.2@127.742,35.811 127.742,42.56 C45.1@127.935,42.753 127.755,42.933 C44.1@127.755,46.431 ; C49.1@140.716,72.566 C49.1@140.871,72.41 ; C50.1@140.723,68.862 C50.1@140.868,69.007 140.868,70.485 140.871,70.488 ; 140.871,78.469 L6.2@141.976,79.573
  Top Layer w0.5: U8.4@123.403,49.719 U8.3@123.403,52.019 123.403,53.482 123.881,53.96 124.785,53.96 125.303,53.442 U8.1@125.303,52.019 U8.6@125.303,49.719 126.364,49.719 127.755,48.331
  Top Layer w0.6: U7.2@127.749,35.804 127.749,39.804 128.9,40.955 131.034,40.955 ; R45.1@132.497,37.226 132.497,39.492 131.034,40.955 ; U10.1@136.103,77.277 U10.6@136.103,79.577 136.103,81.016 136.51,81.422 137.556,81.422 138.003,80.975 U10.4@138.003,79.577 ; U12.3@136.482,36.746 136.482,40.175 135.702,40.955 131.034,40.955 ; U10.3@138.003,77.277 U10.4@138.003,79.577 ; C50.1@140.868,69.007 140.868,67.96 141.803,67.026 143.794,67.026 144.892,65.928 R36.1@144.892,64.607 ; L6.2@141.976,79.573 138.007,79.573 U10.4@138.003,79.577 ; 144.272,67.026 145.699,68.453 148.082,68.453 148.92,67.615 U11.3@148.92,64.125
  Top Layer w0.762: 140.871,70.488 C49.1@140.871,72.41 140.871,78.469
  Top Layer w0.813: U9.2@140.723,63.185 C50.1@140.723,68.862
  Top Layer w2.5: C44.1@127.755,46.431 127.755,48.331 127.755,57.981 v1(129.667,59.893)
  Bottom Layer w2.5: 128.194,58.42 v1(129.667,59.893) 137.14,59.893 137.241,59.792 139.009,61.559 139.009,71.079 141.976,74.046 L6.2@141.976,79.573
  other v1: 128.397,57.785 128.27,59.436
AN0: C31.1 D5.1 R31.2 R32.1 TP32.1 U6.64 | length 111.1
  Top Layer w0.254: 73.279,31.242 73.708,31.671 U6.64@74.287,31.671
  Top Layer w0.305: 73.279,31.242 73.279,28.194 77.343,24.13 78.74,24.13 79.756,23.114 79.756,22.225 80.645,21.336 89.281,21.336 104.013,36.068 v1(104.013,39.624) v1@104.013,39.751
  Top Layer w0.6: TP32.1@104.013,43.688 104.394,43.688 119.507,58.801 119.507,75.946 121.133,77.572 128.666,77.572 129.774,78.679 R32.1@129.774,80.924 C31.1@129.774,82.916 ; D5.1@129.773,85.354 C31.1@129.774,82.916 ; R31.2@131.755,82.916 C31.1@129.774,82.916
  Bottom Layer w0.6: TP32.1@104.003,43.622 104.003,39.634 v1(104.013,39.624)
COMMUNICATION: LD2.3 LINMOD.40 | length 127.4
  Top Layer w0.6: LD2.3@8.128,68.072 8.128,69.454 7.153,70.429 3.851,70.429 2.51,69.088 2.51,35.336 2.51,14.508 15.367,1.651 54.229,1.651 58.039,5.461 LINMOD.40@58.039,7.874